# EAGLE board tiny-bridge (EAGLE 5.07)
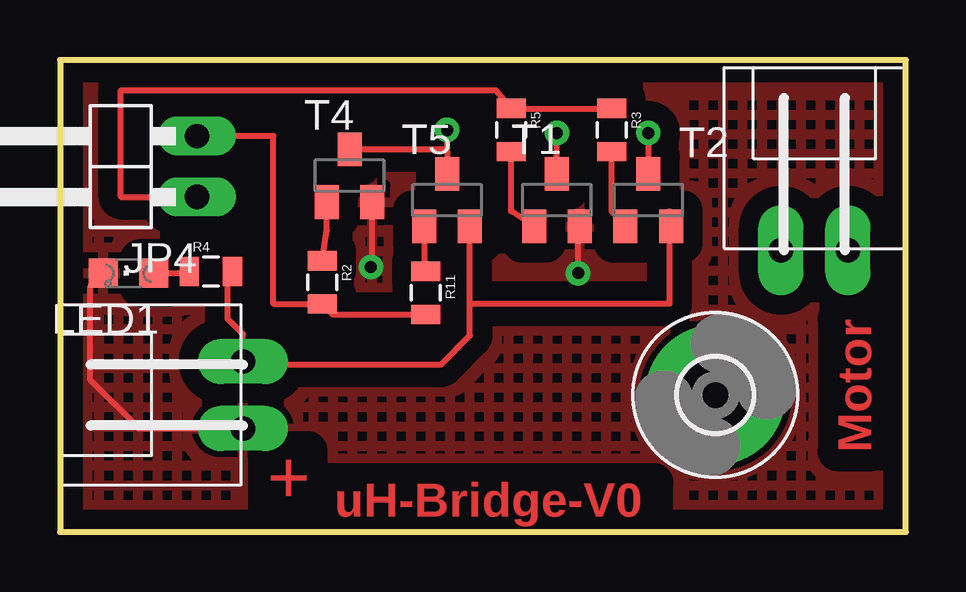
[diagram p0: board, top side]
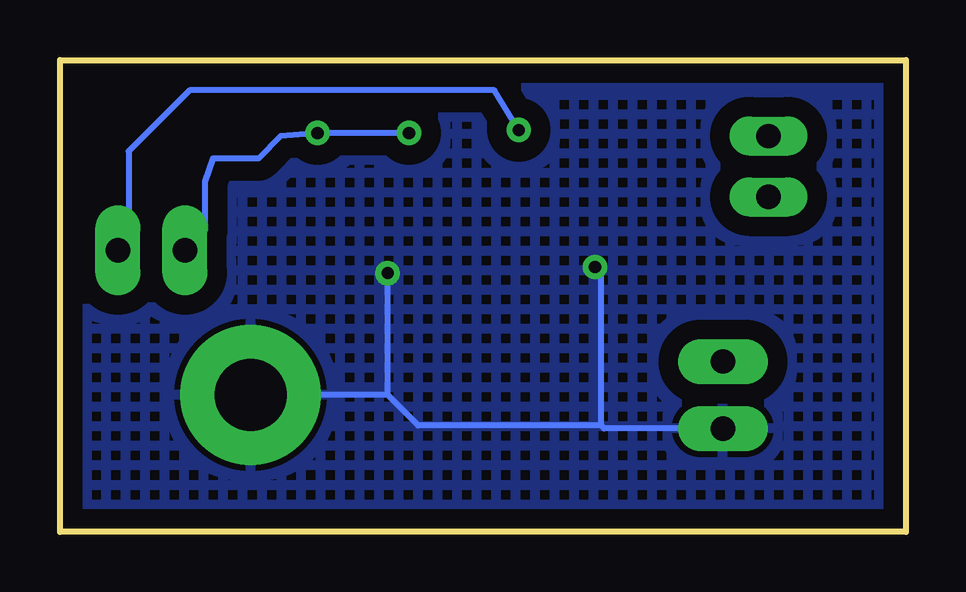
[diagram p1: board, bottom side, seen from below]

Size 35.24 x 19.69 mm. Coordinates in mm from the lower left corner, seen from the top.
Outline: 0,0 35.24,0 35.24,19.69 0,19.69 0,0
Copper layers (1*16): Top 0.035mm / dielectric 1.5mm / Bottom 0.035mm
Design rules "SparkFun-HP1007-600x600dpi": minimum track width 10mil, minimum drill 20mil, track to track 12mil, track to pad 12mil, pad to pad 12mil, via to via 12mil, smd to smd 12mil, copper to edge 12mil, drill to drill 12mil, minimum pad ring 12mil, minimum via ring 10mil, stop-mask expansion 4mil, vias tented up to drill 25mil, thermal gap 10mil

## Footprints (pad centres in the part's own frame; a part is rotated, then mirrored left to right if it is on the bottom)
3,0-PAD = drill 3 pad 5.842 round: B3,0 0,0
XH-1X2-LONG-LOCK = drill 1.016 pad 1.88 long: 1 -1.397,0; 2 1.397,0
1X02/90 = drill 1.016 long: 1 -1.27,-3.81; 2 1.27,-3.81
CHIPLED_0805 = smd 1.2 x 1.2: A 0,-1.05; C 0,1.05
0805 = smd 0.8 x 1.2: 1 -0.9,0; 2 0.9,0
SOT23-BEC = smd 1 x 1.4: B -0.95,-1.1; C 0,1.1; E 0.95,-1.1

## Placement (x,y rotation side)
H3  MOUNT-PAD-ROUND3.0  [3,0-PAD]  27.3,5.71 0 top
JP1  MOTOR  [XH-1X2-LONG-LOCK]  31.43,11.75 0 top
JP3  POWER  [XH-1X2-LONG-LOCK]  7.62,5.71 90 top
JP4  [1X02/90]  1.91,15.24 90 top
LED1  RED  [CHIPLED_0805]  2.86,10.8 90 top
R2  1k  [0805]  10.92,10.41 270 top
R3  1k  [0805]  22.99,16.76 270 top
R4  500  [0805]  6.29,10.86 0 top
R5  1k  [0805]  18.8,16.76 270 top
R11  1k  [0805]  15.24,9.97 270 top
T1  8050  [SOT23-BEC]  20.7,13.84 0 top
T2  8550  [SOT23-BEC]  24.51,13.84 0 top
T4  8050  [SOT23-BEC]  12.06,14.86 0 top
T5  8550  [SOT23-BEC]  16.13,13.84 0 top

## Library data of the parts
H3 = holes
JP1 JP3 LED1 R2-R5 R11 T1 T2 T4 T5 = digital-toy
JP4 = pinhead

## Nets
GND: H3.B3,0 JP3.1 LED1.C T1.E T4.E
N$1: LED1.A R4.1
N$2: R11.1 T5.B
N$3: JP1.2 T4.C T5.C
N$5: R2.1 T4.B
N$6: R3.2 T2.B
N$7: JP1.1 T1.C T2.C
N$8: R5.2 T1.B
N$9: JP4.2 R2.2 R11.2
N$10: JP4.1 R3.1 R5.1
VCC: JP3.2 R4.2 T2.E T5.E

## Tracks (layer width: path | path; a pad name or v marks a point on that pad's centre or on a via)
GND  (via drill 0.51)
  Top 0.254: v21.59,10.8 21.59,12.68 T1.E | T4.E 13.02,11.11 v12.95,11.05 | JP3.1 3.3,4.32 1.27,6.35 1.27,10.26 LED1.C
  Bottom 0.254: JP3.1 8.26,4.32 | 8.26,4.32 8.26,3.81 | 8.26,4.32 12.57,4.32 12.7,4.44 | 21.59,5.71 H3.B3,0 | 21.59,5.71 v21.59,10.8 | 21.59,5.71 20.32,4.44 12.7,4.44 | v12.95,11.05 12.7,10.8 12.7,4.44
  pour Bottom (isolate 0.813, rank 6, hatched): -10.48,22.54 49.85,24.13 46.35,-14.29 -9.84,-10.79
  pour Top (isolate 0.813, hatched): 5.08,26.99 38.1,22.54 38.1,-5.4 33.66,-14.92 -2.54,-17.46 -5.4,-6.99 -7.3,17.78
N$1
  Top 0.254: LED1.A 5.32,10.8 R4.1
N$2
  Top 0.254: R11.1 15.18,11.38 T5.B
N$3  (via drill 0.51)
  Top 0.254: 16.13,15.88 T5.C | 16.13,15.88 v16.13,16.76 | T4.C 16.05,15.96 16.13,15.88
  Bottom 0.254: v16.13,16.76 17.14,18.41 29.84,18.41 32.38,15.88 32.38,12.19 JP1.2
N$5
  Top 0.254: R2.1 11.12,12.58 T4.B
N$6
  Top 0.254: T2.B 22.99,13.38 R3.2
N$7  (via drill 0.51)
  Top 0.254: T1.C v20.7,16.64 | v24.51,16.64 T2.C
  Bottom 0.254: v20.7,16.64 v24.51,16.64 26.04,16.51 26.97,15.58 28.87,15.58 29.21,14.61 29.21,12.57 JP1.1
N$8
  Top 0.254: T1.B 18.8,13.38 R5.2
N$9
  Top 0.254: JP4.2 8.89,16.51 8.89,9.51 R2.2 11.37,9.07 R11.2
N$10
  Top 0.254: JP4.1 2.54,13.97 2.54,18.41 18.16,18.41 R5.1 R3.1
VCC
  Top 0.254: 17.08,9.53 T5.E | T2.E 25.4,13.38 25.4,9.53 17.08,9.53 | 17.08,9.53 17.08,8.19 15.88,6.99 7.75,6.99 JP3.2 7.62,8.25 6.99,8.89 6.99,10.66 R4.2

## Text on the board
Top: Motor | + | uH-Bridge-V0